# Altium PCB ARDevelopmentPlat.PcbDoc
Units mil, origin at the board's own origin, x right, y up, seen from the top; angles counter-clockwise.
Board outline 1173 x 1385 mil, 2 copper layers (Top Layer, Bottom Layer); 36 components, 58 nets, 168 pads, 68 vias.
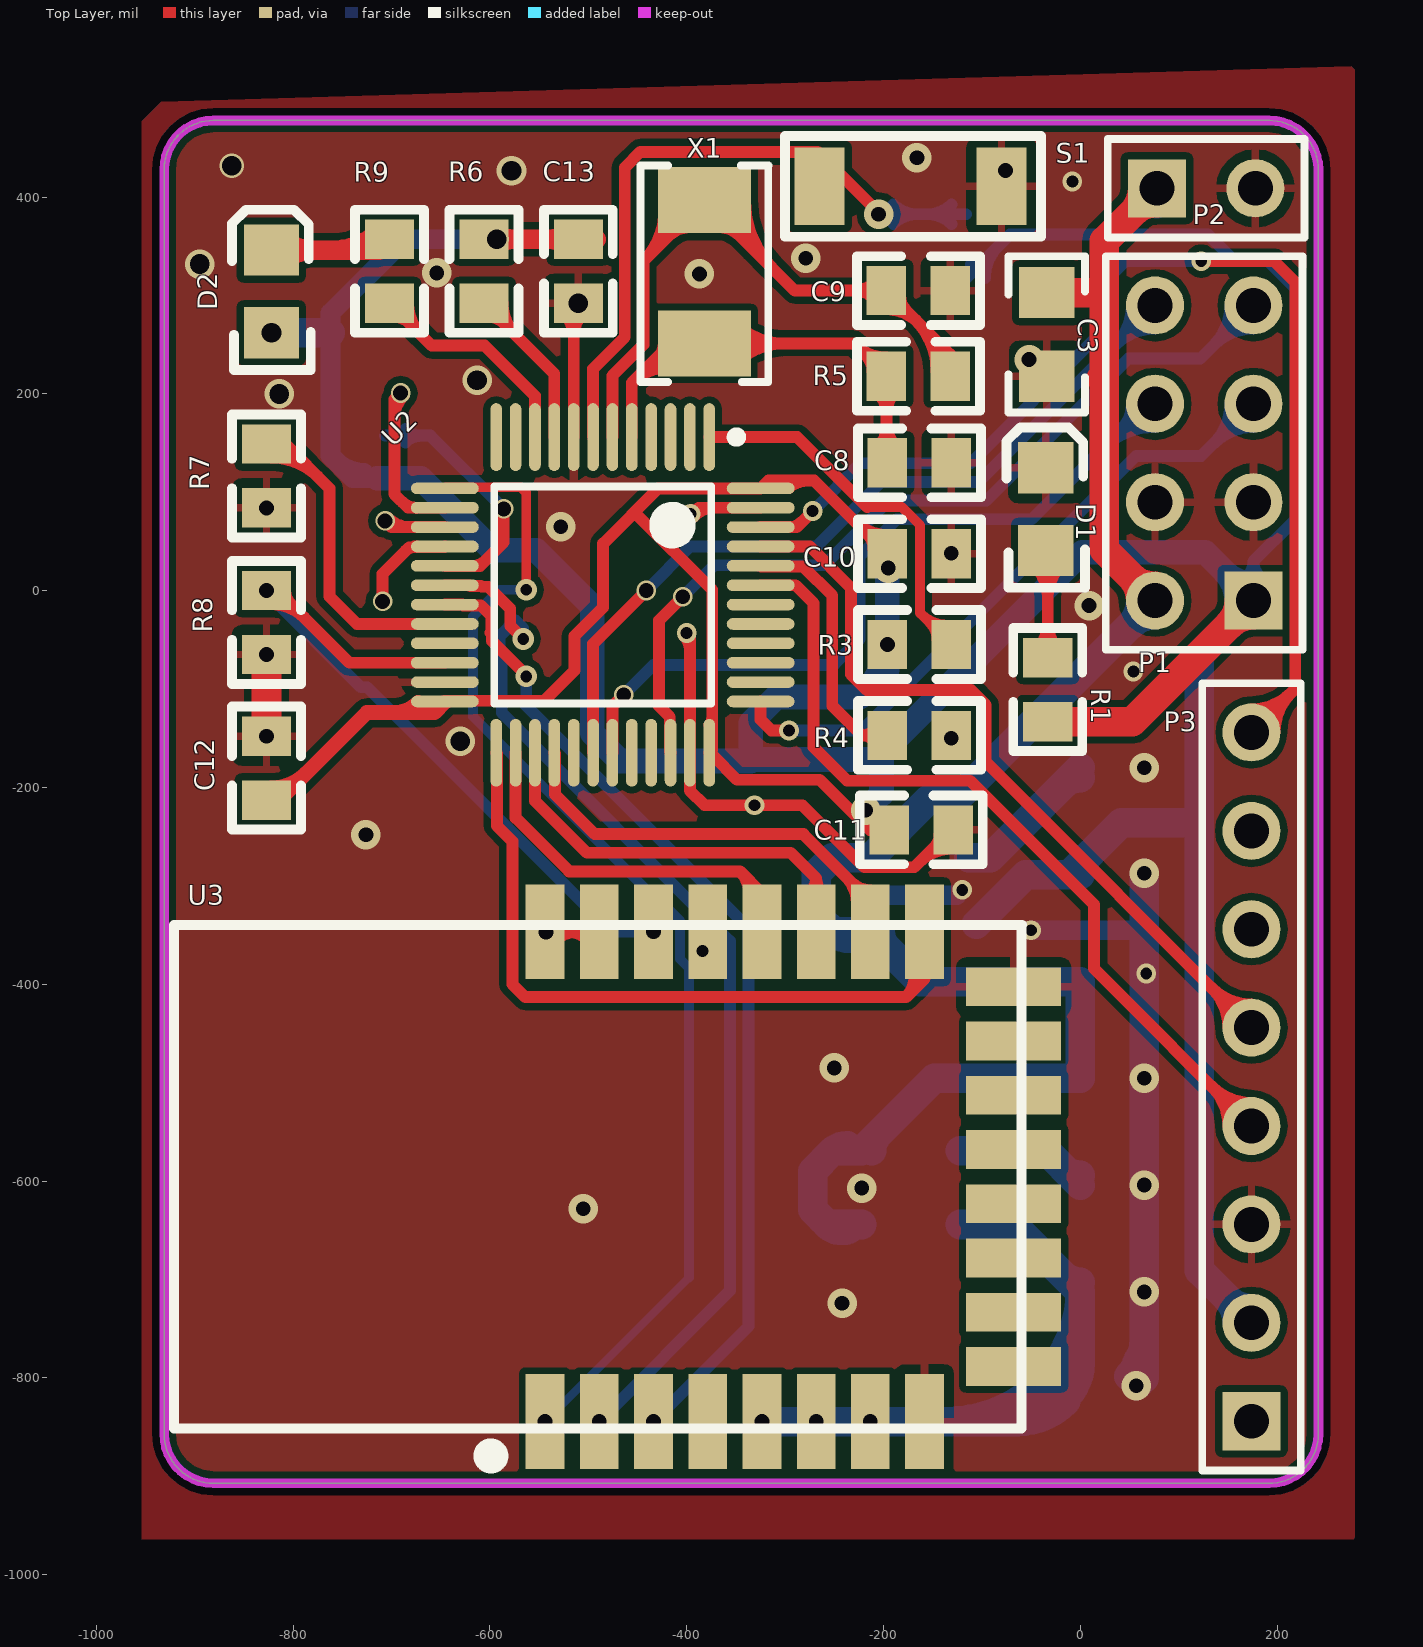
[diagram p0: Top Layer view]
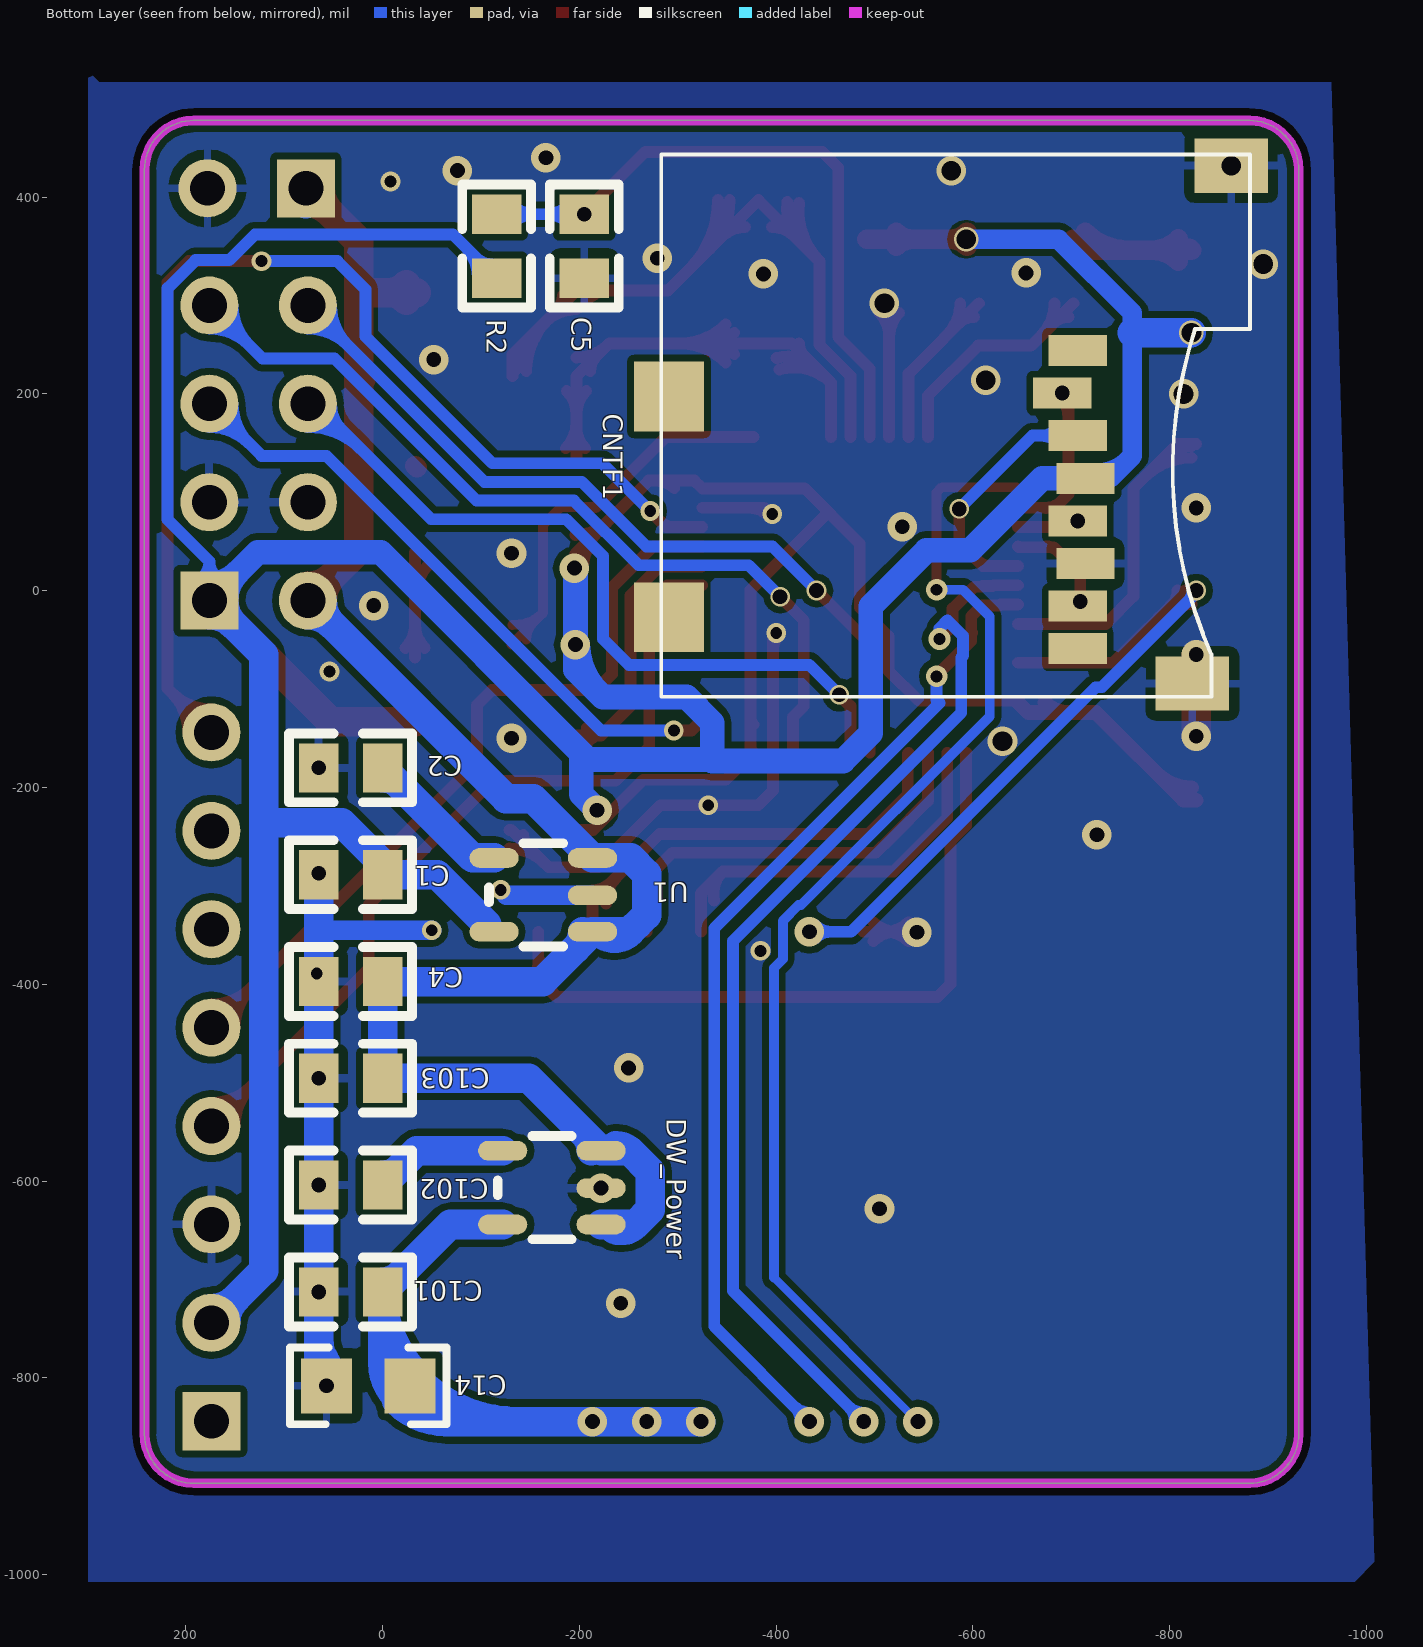
[diagram p1: Bottom Layer view, seen from below]

## Layer stack, top to bottom
Top Solder: solder mask 0.4, Solder Resist, Dk 3.5
Top Layer: signal copper 1.4
Dielectric1: dielectric 12.6, FR-4, Dk 4.8
Bottom Layer: signal copper 1.4
Bottom Solder: solder mask 0.4, Solder Resist, Dk 3.5

## Board outline
-931,-857 ccw(c-881,-857) -881,-907 192,-907 ccw(c192,-857) 242,-857 242,428 ccw(c192,428) 192,478 -881,478 ccw(c-881,428) -931,428

## Design rules (kind name [scope] priority, off if disabled: settings)
AssemblyTestPointUsage AssemblyTestPointUsage_1 [All] p2:
AssemblyTestpoint AssemblyTestpoint_1 [All] p2: testpointundercomponent=TRUE minsize=40 maxsize=100 preferedsize=60 minholesize=0 maxholesize=40 preferedholesize=32 testpointgrid=1 usegrid=TRUE gridtolerance=0.01 allowsidetop=TRUE allowsidebottom=TRUE
Clearance [All] p1: gap=7 ignorepadtopadclearanceinfootprint=FALSE except(0: Arc-Hole Track-Hole SMDPad-Hole THPad-Hole Via-Hole Fill-Hole Poly-Hole Region-Hole Text-Hole)
ComponentClearance [All] p1: gap=1 collisioncheckmode=3 verticalgap=1 showdistances=FALSE
ComponentClearance ComponentClearance_1 [All] p2: gap=1 collisioncheckmode=3 verticalgap=1 showdistances=FALSE
DiffPairsRouting DiffPairsRouting_1 [All] p2: maxlimit=10 minlimit=10 mostfreqgap=10 toplayer_minwidth=15 toplayer_maxwidth=15 toplayer_prefwidth=15 bottomlayer_minwidth=15 bottomlayer_maxwidth=15 bottomlayer_prefwidth=15 maxuncoupledlength=500
FabricationTestPointUsage TestPointUsage [All] p2: valid=0 allowmultiple=FALSE
FabricationTestpoint Testpoint [All] p2: side=3 testpointundercomponent=TRUE minsize=40 maxsize=100 preferedsize=60 minholesize=0 maxholesize=40 preferedholesize=32 testpointgrid=1 allowsidetop=TRUE allowsidebottom=TRUE usegrid=TRUE gridtolerance=0.01
FanoutControl Fanout_LCC [IsLCC] p1: bgadir=Out bgaviamode=Centered fanoutstyle=Auto fanoutdirection=Alternating viagrid=1 // Fanout_LCC (Default Rule)
FanoutControl Fanout_BGA [IsBGA] p2: bgadir=Out bgaviamode=Centered fanoutstyle=Auto fanoutdirection=Alternating viagrid=1 // Fanout_BGA (Default Rule)
FanoutControl Fanout_Small [(CompPinCount < 5)] p3: bgadir=Out bgaviamode=Centered fanoutstyle=Auto fanoutdirection=OutThenIn viagrid=1 // Fanout_Small (Default Rule)
FanoutControl Fanout_SOIC [IsSOIC] p4: bgadir=Out bgaviamode=Centered fanoutstyle=Auto fanoutdirection=Alternating viagrid=1 // Fanout_SOIC (Default Rule)
FanoutControl Fanout_BGA_1 [IsBGA] p6: bgadir=Out bgaviamode=Centered fanoutstyle=Auto fanoutdirection=Alternating viagrid=1 // Fanout_BGA (Default Rule)
FanoutControl Fanout_LCC_1 [IsLCC] p7: bgadir=Out bgaviamode=Centered fanoutstyle=Auto fanoutdirection=Alternating viagrid=1 // Fanout_LCC (Default Rule)
FanoutControl Fanout_SOIC_1 [IsSOIC] p8: bgadir=Out bgaviamode=Centered fanoutstyle=Auto fanoutdirection=Alternating viagrid=1 // Fanout_SOIC (Default Rule)
FanoutControl Fanout_Small_1 [(CompPinCount < 5)] p9: bgadir=Out bgaviamode=Centered fanoutstyle=Auto fanoutdirection=OutThenIn viagrid=1 // Fanout_Small (Default Rule)
FanoutControl Fanout_Default_1 [All] p10: bgadir=Out bgaviamode=Centered fanoutstyle=Auto fanoutdirection=Alternating viagrid=1 // Fanout_Default (Default Rule)
Height Height_1 [All] p2: minheight=0 maxheight=1000 prefheight=500
HoleSize HoleSize_1 [All] p2: absolutevalues=TRUE maxlimit=100 minlimit=1 maxpercent=80.000 minpercent=20.000
HoleToHoleClearance [All] p1: gap=7 allowstackedmicrovias=TRUE
HoleToHoleClearance HoleToHoleClearance_1 [All] p2: gap=7 allowstackedmicrovias=TRUE
LayerPairs LayerPairs_1 [All] p2: enforce=TRUE
MinimumSolderMaskSliver MinimumSolderMaskSliver_1 [All] p2: minsoldermaskwidth=10
NetAntennae NetAntennae_1 [All] p2: netantennaetolerance=0
PasteMaskExpansion PasteMaskExpansion_1 [All] p2: expansion=0
PlaneConnect [All] p1: planeconnectstyle=Relief reliefexpansion=20 reliefentries=4 reliefconductorwidth=15 reliefairgap=10
PolygonConnect PolygonConnect_1 [(InPadClass('All Pads'))] p1: connectstyle=Relief reliefconductorwidth=8 reliefentries=4 polygonreliefangle="90 Angle" airgapwidth=10
PolygonConnect [All] p2: connectstyle=Direct reliefconductorwidth=10 reliefentries=4 polygonreliefangle="90 Angle" airgapwidth=10
RoutingPriority RoutingPriority_1 [All] p2: routingpriority=0
RoutingTopology RoutingTopology_1 [All] p2: topology=Shortest
RoutingVias [All] p1: holewidth=12 width=20 viastyle="Through Hole" minholewidth=12 minwidth=20 maxholewidth=30 maxwidth=50
SilkToSilkClearance SilkToSilkClearance_1 [All] p2: silktosilkclearance=10
SilkToSolderMaskClearance SilkscreenOverComponentPads [IsPad] p1: minsilkscreentomaskgap=10 clearancetoexposedcopper=TRUE
SilkToSolderMaskClearance SilkscreenOverComponentPads_1 [IsPad] p2: minsilkscreentomaskgap=10 clearancetoexposedcopper=TRUE
SolderMaskExpansion [All] p1: expansion=4
SolderMaskExpansion SolderMaskExpansion_1 [All] p2: expansion=4
Width [All] p1: maxlimit=40 minlimit=8 preferedwidth=8
22 further rules are at their usual default settings.

## Classes and differential pairs
component class ARDevelopmentPlat: C5 C8 C9 C10 C11 C12 C13 C15 C101 C102 C103 CNTF1 D1 D2 P2 P3 R1 R2 R3 R4 R5 R6 R7 R8 R9 S1 U2 U3 U4 X1

## Components (designator, comment, footprint, x,y, rotation, side; value= is the part's Value field where it differs from the comment)
C1 "Cap" RC0603 65,-288.58 r180 bottom
C2 "Cap" RC0603 65,-180 r180 bottom
C3 "10uF" RC0805 -34,303 r270 top
C4 "Cap" RC0603 65,-397.17 r180 bottom
C5 "104" RC0603 -204.94,382.73 r270 bottom value=100nF
C8 "22pF" RC0603 -196,130 r0 top value=20pF
C9 "22pF" RC0603 -197,305 r0 top value=20pF
C10 "104" RC0603 -196,37.67 r0 top value=100nF
C11 "104" RC0603 -194,-243 r0 top value=100nF
C12 "104" RC0603 -827,-212.8 r90 top value=100nF
C13 "104" RC0603 -510.03,357.2 r270 top value=100nF
C14 "106" RC0805 -28,-808.08 r0 bottom
C101 "Cap" RC0603 65,-712.58 r180 bottom value=2.2uF
C102 "Cap" RC0603 65,-604 r180 bottom value=0.01uF
C103 "Cap" RC0603 65,-495.42 r180 bottom value=0.1uF
CNTF1 "TFCard" "MICRO SD" -882,266.2 r90 bottom
D1 "LED0" LED0805 -35,41 r270 top
D2 "LED0" LED0805 -822,262.2 r270 top
DW_Power "TPS79333" SOT-23-5 -222,-644.08 r90 bottom (schematic designator U4)
P1 "Header 4X2" HDR2X4 176,-10 r90 top
P2 "Header 2" HDR1X2 78,409 r0 top
P3 "Header 8" HDR1X8 174,-844 r90 top
R1 "510R" RC0603 -33,-68 r270 top
R2 "10K" RC0603 -115.94,382.73 r270 bottom
R3 "0R" RC0603 -131,-54.66 r180 top
R4 "10K" RC0603 -131,-147 r180 top
R5 "1M" RC0603 -132,218 r180 top
R6 "0R" RC0603 -606.02,292.2 r90 top
R7 "10K" RC0603 -827,149.2 r270 top
R8 "Res2" RC0603 -827,-64.8 r90 top value=10K
R9 "510R" RC0603 -702,292.2 r90 top
S1 "SW-SPST" SMT-KEY -265,411 r270 top
U1 "TPS79333" SOT-23-5 -213.29,-346.54 r90 bottom
U2 "STM32F103C8T6" LQFP48 -377,156.2 r180 top
U3 "DW1000" DWM1000 -539,-849.33 r90 top
X1 "8M" SMD5032 -382,397 r270 top value=8MHz

## Footprints (in the part's own frame and the unit in brackets; to place one, negate y for a bottom-side part, rotate by r counter-clockwise, add the part's x,y. Pads: shape width x height; smd on the part's side, far side on the other; paste and mask are expansions set on the pad)
DWM1000 [mm]
  rect 2.45x1 smd: 1(0.127,0.127) 2(0.127,-1.273) 3(0.127,-2.673) 4(0.127,-4.073) 5(0.127,-5.473) 6(0.127,-6.873) 7(0.127,-8.273) 8(0.127,-9.673) 17(12.771,-9.673) 18(12.771,-8.273) 19(12.771,-6.873) 20(12.771,-5.473) 21(12.771,-4.073) 22(12.771,-2.673) 23(12.771,-1.273) 24(12.771,0.127)
  rect 1x2.45 smd: 9(1.549,-11.971) 10(2.949,-11.971) 11(4.349,-11.971) 12(5.749,-11.971) 13(7.149,-11.971) 14(8.549,-11.971) 15(9.949,-11.971) 16(11.349,-11.971)
  silkscreen extent -0.86,-12.19 12.95,9.7
HDR1X2 [mm] "Connector; Header; 2 Position"
  rect 1.5x1.5 hole 0.9: 1(0,0)
  round 1.5 hole 0.9: 2(2.54,0)
  silkscreen extent -1.27,-1.27 3.81,1.27
HDR1X8 [mm] "Connector; Header; 8 Position"
  rect 1.5x1.5 hole 0.9: 1(0,0)
  round 1.5 hole 0.9: 2(2.54,0) 3(5.08,0) 4(7.62,0) 5(10.16,0) 6(12.7,0) 7(15.24,0) 8(17.78,0)
  silkscreen extent -1.27,-1.27 19.05,1.27
HDR2X4 [mm] "Connector; Header; 4x2 Position"
  rect 1.5x1.5 hole 0.9: 1(0,0)
  round 1.5 hole 0.9: 2(0,2.54) 3(2.54,0) 4(2.54,2.54) 5(5.08,0) 6(5.08,2.54) 7(7.62,0) 8(7.62,2.54)
  silkscreen extent -1.27,-1.27 8.89,3.81
LED0805 [mil]
  rect 52x56 smd: 1(0,0) 2(-84,0)
  Top Layer lines w20: -84,0 -86,2
  silkscreen extent -125,-40 38,40
LQFP48 [mm]
  oval 0.3x1.75 smd: 1(0,0) 2(0.5,0) 3(1,0) 4(1.5,0) 5(2,0) 6(2.5,0) 7(3,0) 8(3.5,0) 9(4,0) 10(4.5,0) 11(5,0) 12(5.5,0) 25(5.5,8.15) 26(5,8.15) 27(4.5,8.15) 28(4,8.15) 29(3.5,8.15) 30(3,8.15) 31(2.5,8.15) 32(2,8.15) 33(1.5,8.15) 34(1,8.15) 35(0.5,8.15) 36(0,8.15)
  oval 1.75x0.3 smd: 13(6.825,1.325) 14(6.825,1.825) 15(6.825,2.325) 16(6.825,2.825) 17(6.825,3.325) 18(6.825,3.825) 19(6.825,4.325) 20(6.825,4.825) 21(6.825,5.325) 22(6.825,5.825) 23(6.825,6.325) 24(6.825,6.825) 37(-1.325,6.825) 38(-1.325,6.325) 39(-1.325,5.825) 40(-1.325,5.325) 41(-1.325,4.825) 42(-1.325,4.325) 43(-1.325,3.825) 44(-1.325,3.325) 45(-1.325,2.825) 46(-1.325,2.325) 47(-1.325,1.825) 48(-1.325,1.325)
  silkscreen extent -0.83,-0.12 5.55,6.88
"MICRO SD" [mm]
  rect 0.8x1.5 smd: 1(-0.558,4.459) 2(-1.658,4.859) 3(-2.758,4.459) 4(-3.858,4.259) 5(-4.958,4.459) 6(-6.058,4.259) 7(-7.158,4.459) 8(-8.258,4.459)
  rect 1.4x1.9 smd: 9(-9.158,1.499) 9(4.212,0.499)
  rect 1.8x1.8 smd: ""(-7.448,15.009) ""(-1.748,15.009)
  silkscreen extent -9.5,0.01 4.5,15.21
RC0603 [mil]
  rect 40x50 smd: 1(0,0) 2(65,0)
  silkscreen extent -30,-35 95,35
RC0805 [mil]
  rect 52x56 smd: 1(0,0) 2(85,0)
  silkscreen extent -37,-39 122,39
SMD5032 [mm]
  rect 1.7x2.4 smd: 1(0,0) 2(3.7,0)
  silkscreen extent -0.89,-1.65 4.7,1.65
SMT-KEY [mm]
  rect 2x1.3 smd paste+0 mask+0.2: 1(0,0) 2(0,4.7)
  silkscreen extent -1.3,-0.89 1.3,5.72
SOT-23-5 [mil]
  oval 20x50 smd: 1(0,0) 2(37,0) 3(75,0) 4(75,100) 5(0,100)
  silkscreen extent -15,30 90,105

## Part data
C1 C2 C101 C102 C103: "Capacitor"
  C101 C102 C103: LatestRevisionDate=17-Jul-2002, LatestRevisionNote="Re-released for DXP Platform.", PackageDescription="Radial Cap, Thru-Hole; 2 Leads; 0.3 in Pin Spacing", PackageReference=RAD-0.3, Published=8-Jun-2000, Publisher="Altium Limited"
C3: library part cap_polarity2, "Electrolytic Capacitor"
C4: library part CAP, "Capacitor"
C5 C8 C9 C10 C11 C12 C13: library part CAP1, "Capacitor", Tolerate=50V, PCB_Layout="Top Layer SMC", Publisher=ZL_A0OFFICE, Revision=2012-3-28
  C5 C10 C11 C12 C13: ERP=0103020075, TOL=10%
  C8 C9: ERP=0103020090, TOL=2%
C14: library part CAP1, "Capacitor"
D1 D2: "Typical INFRARED GaAs LED"
P1: "Header, 4-Pin, Dual row"
P2: "Header, 2-Pin", LatestRevisionDate=17-Jul-2002, LatestRevisionNote="Re-released for DXP Platform.", Publisher="Altium Limited"
P3: "Header, 8-Pin", LatestRevisionDate=17-Jul-2002, LatestRevisionNote="Re-released for DXP Platform.", Publisher="Altium Limited"
R1 R2 R3 R4 R5 R6 R7 R9: library part R
R8: "Resistor", LatestRevisionDate=17-Jul-2002, LatestRevisionNote="Re-released for DXP Platform.", PackageDescription="Axial Device, Thru-Hole; 2 Leads; 0.4 in Pin Spacing", PackageReference=AXIAL-0.4, Published=8-Jun-2000, Publisher="Altium Limited"
S1: "Single-Pole, Single-Throw Switch"
X1: library part XTAL_SMD, "Crystal Oscillator", Tolerate="ROSON -20_+70 20pf", ERP=0103040021, PCB_Layout="Top Layer SMC", Publisher=ZL_A0OFFICE, Revision=2012-3-28, TOL=±20ppm

## Via types
v1: diameter 30, hole 15, Top Layer to Bottom Layer, 36 vias
v2: diameter 20, hole 12, Top Layer to Bottom Layer, 12 vias
v3: diameter 20, hole 15, Top Layer to Bottom Layer, 8 vias
v4: diameter 30, hole 20, Top Layer to Bottom Layer, 6 vias
v5: diameter 22, hole 12, Top Layer to Bottom Layer, 3 vias
v6: diameter 25, hole 20, Top Layer to Bottom Layer, 3 vias

## Nets (pads, with @x,y where several pads share a name; then routed paths per layer and width w, separated by ;. In a path a pad name is that pad's centre, name@x,y a point inside that pad or via, vN(x,y) a via of type N, cw(c..) or ccw(c..) an arc to the next point about the centre after c; other vN are vias at no path point)
3V3: C1.2 C10.1 C11.1 C12.1 C13.1 CNTF1.4 D2.1 P1.1 P3.2 R1.2 R2.2 R3.2 R6.2 U1.5 U2.24 U2.36 U2.48 | length 6205.8
  Top Layer w12: U2.24@-645.7,-113.32 -644.2,-111.82 -544.82,-111.82 -514.11,-81.11 -514.11,-46.04 -485,-16.93 -485,48 -428.97,104.03 U2.48 -316.87,112 -270.33,112 C10.1 ; -452,79 -374,1 -374,-161.67 U2.36 ; U2.36@-376.93,-136.19 ccw(c-384.02,-129.11) -374,-129.11 ; U2.36@-373.07,-167.87 -348.95,-192 -264.87,-192 -213.87,-243 C11.1 ; -228.44,70.1 ccw(c-196,102.54) C10.1@-196,56.67 ; -220.03,61.69 cw(c-258.72,23) C10.1@-204,23 ; -216.37,58.03 cw(c-231.73,42.67) C10.1@-210,42.67 ; C10.1@-199.54,41.21 cw(c-217.75,23) C10.1@-192,23 ; U2.48@-296.36,104.1 cw(c-277.28,85.02) -277.28,112 ccw(c-277.28,85.02) U2.48@-296.36,104.1
  Top Layer w15: C12.1 -814,-212.8 -725,-123.8 -656.18,-123.8 U2.24@-645.7,-113.32 ; C12.1@-822,-200.3 ccw(c-822,-150.81) -787,-185.81 ; -697.67,-123.8 ccw(c-697.67,-89.08) U2.24@-673.12,-113.63
  Top Layer w20: R6.2@-593.95,350.13 cw(c-576.87,333.06) -576.87,357.2 cw(c-576.87,381.34) R6.2@-593.95,364.27 ; v6(-593,357.2) C13.1 C13.1@-492,357.2 ; C13.1@-522.1,350.13 ccw(c-539.17,333.06) -539.17,357.2 ccw(c-539.17,381.34) C13.1@-522.1,364.27
  Top Layer w30: R1.2 53,-133 P1.1 ; P1.1@161.47,-10 cw(c126.4,-10) 151.2,-34.8 cw(c176,-59.6) P1.1@176,-24.53
  Bottom Layer w12: R2.2 -71.67,362 130,362 156,336 190.14,336 218.53,307.62 218.53,72.39 176,29.86 ; R2.2@-110.94,331.73 ccw(c-110.94,353.46) -95.57,338.1 ; R2.2@-96.94,317.73 cw(c-51.07,317.73) -83.5,350.17 ; P1.1@164.63,10.6 ccw(c154.01,29.86) 176,29.86 ; P1.1 176,29.86 ; P1.1@187.37,10.6 cw(c197.99,29.86) 176,29.86
  Bottom Layer w20: -762,262.2 -762,137.2 -739.12,114.32 CNTF1.4 ; -762,266.2 -762,282.2 -687,357.2 v6(-593,357.2) ; -756.74,131.93 ccw(c-728.09,160.58) CNTF1.4@-728.09,120.07
  Bottom Layer w25: CNTF1.4 -670.32,114.32 -597,41 -552.79,41 -496,-15.79 -496,-145 -468,-173 -335,-173 -335,-134 -309,-108 -223.88,-108 -196,-80.12 v1(-196,-54.67) v1@-196,23 ; -333.5,-171.5 -208.5,-171.5 2.03,39.03 126.97,39.03 P1.1 ; -218.27,-102.38 ccw(c-265.98,-54.67) v1@-198.5,-54.67 ; v1(-218,-223) -202,-207 -202,-173 ; P1.1@158.97,-10 ccw(c117.87,-10) 146.93,19.07 ccw(c176,48.14) P1.1@176,7.03
  Bottom Layer w30: v6(-822,262.2) -762,262.2 ; U1.5@-105.88,-339.12 -55.34,-288.58 C1.2@-11.11,-288.58 ; C1.2 C1.2@-11.11,-288.58 ; P3.2@159.47,-744 ccw(c124.4,-744) 149.2,-719.2 ccw(c174,-694.4) P3.2@174,-729.47 ; P1.1@161.47,-10 cw(c126.4,-10) 151.2,-34.8 cw(c176,-59.6) P1.1@176,-24.53 ; P3.2 121,-691 121,-236 ; P1.1 121,-65 121,-236 ; C1.2@-11.11,-288.58 41.47,-236 121,-236
  other v1: -195,23
3V3_DW: C14.1 C101.2 DW_Power.5 U3.5 U3.6 U3.7 | length 939.1
  Bottom Layer w30: v1(-323.53,-844.33) -64.25,-844.33 C14.1 0,-780.08 C101.2 ; -137.24,-844.33 ccw(c-137.24,-700.84) C14.1@-35.78,-802.31 ; DW_Power.5 -68.5,-644.08 C101.2 ; -64.82,-844.33 ccw(c-64.82,-773.27) C14.1@-14.56,-823.52 ; C14.1@-50.19,-830.28 cw(c-28,-852.47) C14.1@-28,-821.08 ; C14.1@-35.74,-798.27 ccw(c-120.57,-712.59) C101.2 ; C14.1@-28,-795.08 ccw(c-28,-763.7) C14.1@-5.81,-785.89 ; C101.2@-17.07,-695.51 ccw(c0,-678.44) C101.2@0,-702.58 ; C14.1@-14.63,-819.59 ccw(c-49.36,-784.51) 0,-784.51
  other v1: -268.41,-844.33 -213.29,-844.33
5V: C3.1 C4.2 C103.2 DW_Power.1 DW_Power.3 P1.2 P2.1 U1.1 U1.3 | length 2218.7
  Top Layer w30: C3.1 24.47,303 ; C3.1@-24.22,295.22 cw(c-5.44,276.44) -5.44,303 cw(c-5.44,329.56) C3.1@-24.22,310.78 ; 21.47,216 24.47,219 ; P1.2@61.47,-10 ccw(c26.4,-10) 51.2,14.8 ccw(c76,39.6) P1.2@76,4.53 ; P2.1@63.47,409 cw(c28.4,409) 53.2,384.2 cw(c78,359.4) P2.1@78,394.47 ; P1.2 24.47,41.53 24.47,219 ; P2.1 24.47,355.47 24.47,219
  Bottom Layer w30: -262.46,-638.54 ccw(c-237,-613.07) DW_Power.1@-237,-649.08 ; -259.31,-338.69 ccw(c-228.29,-307.67) U1.1@-228.29,-351.54 ; -256.92,-644.08 ccw(c-242.45,-629.62) DW_Power.1@-235.24,-648.76 ; -252.51,-570.51 cw(c-237,-586.01) DW_Power.3@-237,-564.08 ; U1.1@-226.21,-351.08 cw(c-235.56,-330.64) -251.46,-346.54 ; DW_Power.1 -256.92,-644.08 -272,-629 -272,-590 -251.08,-569.08 DW_Power.3 -148.33,-495.42 C103.2 C4.2 -162.66,-397.17 U1.1 -251.46,-346.54 ; DW_Power.3@-212,-569.08 cw(c-187.86,-569.08) -204.93,-552.01 ; U1.1@-203.29,-346.54 ccw(c-179.15,-346.54) -196.22,-363.61 ; P1.2@61.47,-10 cw(c26.4,-10) 51.2,-34.8 cw(c76,-59.6) P1.2@76,-24.53 ; P1.2 -125.25,-211.25 -153,-211.25 U1.3 -252.19,-271.54 -268.41,-287.76 -268.41,-329.59 -251.46,-346.54 ; P2.1@78,393.56 P2.1
BOOT0: R4.2 U2.44 | length 299.8
  Top Layer w12: U2.44 -324.15,24.61 -281.37,24.61 -252,-4.76 -252,-117 -222,-147 ; R4.2@-207.69,-154.7 ccw(c-222,-164.14) -222,-147 ; R4.2@-207.69,-139.29 cw(c-222,-129.86) -222,-147 ; R4.2 -222,-147
DRDY: P3.8 U2.46 | length 1272.4
  Top Layer w12: U2.46 -288.34,64.66 v2(-272,81) ; U2.46@-296.29,64.57 ccw(c-296.29,83.53) -282.88,70.12 ; v2(123,335) 197,335 218.53,313.47 218.53,-99.47 P3.8 ; P3.8@174,-120.47 ccw(c174,-63.67) 214.16,-103.84 ccw(c254.33,-144) P3.8@197.53,-144
  Bottom Layer w12: v2(-272,81) -223.33,129.67 -111.33,129.67 17.5,258.5 17.5,306.5 46,335 v2(123,335)
DW_LED_RX: U3.13
DW_LED_TX: U3.12
DWM_RSTN: U2.19 U3.3 | length 1056.5
  Top Layer w12: U2.19 -627.79,-14.08 -627.01,-14.86 -609.33,-14.86 -598.25,-25.93 -598.25,-41.59 -599.26,-42.61 -598,-43.87 -598,-50.94 -563,-85.94 v5(-563,-87)
  Bottom Layer w12: v5(-563,-87) -563,-111 -566,-114 -337,-343 -337,-747.57 v1(-433.76,-844.33) ; v1@-433.76,-835.33 ccw(c-433.76,-813.61) -418.4,-828.97 ccw(c-403.04,-844.33) v1@-424.76,-844.33
DWM_WAKEUP: U2.18 U3.2 | length 1141.9
  Top Layer w12: U2.18 -620.61,5.61 -619.83,4.83 -609.33,4.83 -608.64,4.14 -601.46,4.14 -579.25,-18.06 -579.25,-35.75 v5(-566,-49)
  Bottom Layer w12: v5(-566,-49) -566,-38.06 -574,-30.06 -590,-46.06 -590,-65.94 -588,-67.94 -588,-124 -356,-356 -356,-711.45 v1(-488.88,-844.33) ; v1@-488.88,-835.33 ccw(c-488.88,-813.61) -473.52,-828.97 ccw(c-458.15,-844.33) v1@-479.88,-844.33
EXTON: 
G0: U3.15
G1: U3.14
G4: U3.11
G5: U3.10
G6: U3.9
GND: C1.1 C2.1 C3.2 C4.1 C5.2 C8.2 C9.2 C10.2 C11.2 C12.2 C13.2 C14.2 C101.1 C102.1 C103.1 CNTF1.6 CNTF1.9 D1.2 DW_Power.2 P1.3 P1.4 P2.2 P3.3 R4.1 R7.2 R8.1 S1.2 U1.2 U2.8 U2.23 U2.35 U2.47 U3.8 U3.16 U3.21 U3.23 U3.24 | length 2037.9
  Top Layer w12: C12.2@-835.05,-136.35 ccw(c-845.97,-120.84) -827,-120.84 ccw(c-808.03,-120.84) C12.2@-818.94,-136.35 ; C12.2@-833.36,-141.44 ccw(c-848.73,-126.07) -827,-126.07 ccw(c-805.27,-126.07) C12.2@-820.64,-141.44 ; U3.24 U3.23 ; U3.24@-536.64,-353.36 cw(c-520.16,-369.84) -520.16,-346.54 ; U3.24@-536.64,-340.64 ccw(c-522.39,-326.39) -522.39,-346.54 ; U3.24@-534.32,-356.21 cw(c-510.96,-379.58) -510.96,-346.54 cw(c-510.96,-313.5) U3.24@-534.32,-336.86 ; C13.2@-524.93,282.3 cw(c-549.41,257.82) -514.79,257.82 ; U2.8 -514.79,287.44 v4(-510.03,292.2) ; C13.2@-505.13,282.3 ccw(c-481.81,258.98) -514.79,258.98 cw(c-476.81,258.98) C13.2@-503.67,285.83 ; U3.23@-498.56,-356.21 ccw(c-521.92,-379.58) -521.92,-346.54 ccw(c-521.92,-313.5) U3.23@-498.56,-336.86 ; v2@-402.83,-45.83 cw(c-417.66,-60.66) -396.68,-60.66 ; v2(-400,-43) -396.68,-46.32 U2.35 -396.68,-203.12 -381.8,-218 v2(-331,-218) -282.38,-218 -219.38,-281 -168.61,-281 -130.61,-243 C11.2 ; v2@-395.3,81.94 ccw(c-393.79,90.48) -387.65,84.35 ; v2@-394,78 -387.65,84.35 ; v2@-393.17,75.17 cw(c-371.02,53.02) -371.02,84.35 ; U2.47 -387.65,84.35 ; -164.19,-276.58 cw(c-129,-311.77) C11.2@-129,-262 ; C11.2@-148.22,-260.61 ccw(c-160.83,-248) C11.2@-143,-248
  Top Layer w30: v1(-827,-147.8) v1(-827,-64.8)
  Bottom Layer w20: U1.2 v2@-125.54,-309.54 ; v2(-50,-345) 64,-345
  Bottom Layer w30: C14.2@49.22,-798.31 ccw(c11.13,-760.21) 65,-760.21 ; 59.81,-779.97 ccw(c89.54,-797.14) v1(57,-808.08) ; C14.2@65,-788.77 cw(c37.68,-788.77) v1(57,-808.08) ; v1(65,-287) C4.1 v1(65,-604) 65,-800.08 v1(57,-808.08)
  other v1: -242,-724 65,-712.58 -505,-628 -222,-607.08 65,-495.42 -250,-485 -543,-347 -726,-248 65,-180 -131,-150 9,-15 -131,38 -528,65 -827,84.2 -52,235 -387,322 -654,323 -279,338 -76,427 -166,440
  other v2: 67,-389 -384,-366 -120,-304 54,-82 -396,78 -8,416
  other v4: -630,-153 -814,200 -613,214 -895,332 -578,427
  other v6: -862.34,432.04
NetC2_2: C2.2 U1.4 | length 170.2
  Bottom Layer w30: U1.4 -91.54,-271.54 C2.2 ; C2.2@-17.07,-197.07 cw(c0,-214.14) C2.2@0,-190
NetC8_1: C8.1 R5.2 U2.5 X1.2 | length 869.1
  Top Layer w12: U2.5 -455.74,211.33 ; -441.31,225.75 cw(c-411.57,196.01) X1.2@-400.02,236.46 ; X1.2@-428.55,238.52 ccw(c-441.37,251.33) X1.2@-423.24,251.33 ; X1.2@-403.32,224.92 ccw(c-417.97,173.56) -455.74,211.33 ; X1.2@-357.29,240.4 cw(c-330.89,214) -330.89,251.33 cw(c-330.89,288.67) X1.2@-357.29,262.27 ; X1.2@-348.8,231.91 cw(c-301.92,185.03) -301.92,251.33 cw(c-301.92,317.64) X1.2@-348.8,270.75 ; -229.44,250.44 ccw(c-197,282.87) R5.2@-197,237 ; -217.37,238.37 cw(c-232.73,223) R5.2@-211,223 ; R5.2@-206.9,203.1 cw(c-230.8,179.2) -197,179.2 cw(c-163.2,179.2) R5.2@-187.1,203.1 ; C8.1@-205.9,144.9 ccw(c-227.38,166.38) -197,166.38 ; C8.1@-197,131 R5.2 -230.33,251.33 X1.2 -415.74,251.33 -455.74,211.33 ; -197,171.21 ccw(c-159.79,171.21) C8.1@-186.1,144.9
NetC9_1: C9.1 R5.1 U2.6 X1.1 | length 1114.6
  Top Layer w12: U2.6 -475.42,218.51 -444,249.94 -444,335 ; -426.22,352.78 ccw(c-463.3,389.85) X1.1@-411.16,395.37 ; X1.1@-423.09,394.11 cw(c-495.44,386.45) -444,335 ; -419.14,359.86 cw(c-395.78,336.5) X1.1@-395.78,369.54 ; X1.1@-368.22,369.54 cw(c-368.22,336.5) -344.86,359.86 ; X1.1@-352.76,397 ccw(c-282.15,397) -332.08,347.08 ; X1.1@-340.76,397 ccw(c-241.18,397) -311.59,326.59 ; C9.1@-206.9,295.1 ccw(c-230.8,271.2) -230.8,305 ccw(c-230.8,338.8) C9.1@-206.9,314.9 ; C9.1@-197,286 cw(c-197,240.13) -164.56,272.56 ; C9.1@-183,300 ccw(c-161.27,300) -176.63,284.64 ; -167.92,275.92 cw(c-220.85,223) R5.1@-146,223 ; -147.44,255.44 cw(c-179.87,223) R5.1@-134,223 ; R5.1 -132,240 C9.1 -290,305 X1.1 -444,335
NetC102_2: C102.2 DW_Power.4 | length 155.4
  Bottom Layer w30: DW_Power.4 -34.92,-569.08 C102.2 ; C102.2@-17.07,-586.93 ccw(c0,-569.86) C102.2@0,-594
NetD1_1: D1.1 R1.1 | length 235.9
  Top Layer w12: D1.1@-47.14,26.86 cw(c-81.29,-7.29) -33,-7.29 cw(c15.28,-7.28) D1.1@-18.86,26.86 ; R1.1@-42.9,-58.1 ccw(c-66.8,-34.2) -33,-34.2 ccw(c0.8,-34.2) R1.1@-23.1,-58.1 ; R1.1 D1.1@-33,39
NetD2_2: D2.2 R9.2 | length 233.7
  Top Layer w20: D2.2 -713,346.2 R9.2 ; D2.2@-808.69,334.88 cw(c-781.37,307.57) -781.37,346.2 cw(c-781.37,384.83) D2.2@-808.69,357.51 ; -757.7,346.2 ccw(c-757.7,407.9) R9.2@-714.07,364.27
NRST: C5.1 R2.1 S1.1 U2.7 | length 808
  Top Layer w12: U2.7 -495.11,225.7 -463,257.81 -463,430 -447,446 -267,446 -204.93,383.93 v1(-204.93,382.73)
  Bottom Layer w12: v1(-204.93,382.73) R2.1 ; C5.1@-198.57,376.37 cw(c-183.21,361.01) -183.21,382.73 cw(c-183.21,404.46) C5.1@-198.57,389.1 ; C5.1@-190.04,372.83 cw(c-166.13,348.93) -166.13,382.73 cw(c-166.14,416.53) C5.1@-190.04,392.63 ; R2.1@-130.84,372.83 ccw(c-154.73,348.93) -154.73,382.73 ccw(c-154.73,416.53) R2.1@-130.84,392.63
PA0: R9.1 U2.10 | length 281.8
  Top Layer w12: R9.1 -659,249.2 -605.2,249.2 -554.17,198.17 U2.10 ; R9.1@-697,278.2 cw(c-697,256.47) -681.64,271.83 ; R9.1@-683,292.2 ccw(c-637.13,292.2) -669.57,259.76
PA1: U2.11
PA2: U2.12
PA3: U2.13 U3.1 | length 1220.9
  Top Layer w10: U2.13 -644.53,105.2 -568.2,105.2 -563,100 v5(-563,1)
  Bottom Layer w8: v1(-544,-844.33) -397.67,-698
  Bottom Layer w10: v5(-563,1) -590,1 -617,-26 -617,-127.82 -425.28,-319.54 -422.58,-319.54 -406.76,-335.35 -406.76,-374.35 -397.67,-383.45 -397.67,-698
PA8: U2.29
PA11: U2.32
PA12: U2.33
PB2: R7.1 U2.20 | length 405
  Top Layer w12: R7.1 -808,149.2 -763,104.2 -763,-5.8 -735,-33.8 -645.74,-33.8 U2.20 ; R7.1@-822,135.2 cw(c-822,67.6) -774.2,115.4 ; R7.1@-822,147.2 cw(c-822,108.57) -794.69,135.89
PB5: U2.41
PB6: U2.42
PB10: U2.21
PB11: R8.2 U2.22 U3.22 | length 877.2
  Top Layer w12: R8.2@-827,-3.8 cw(c-827,-40.02) -801.39,-14.41 ; v3(-827,0.2) -816,0.2 -742.67,-73.13 U2.22 ; R8.2@-822,-13.8 cw(c-822,-62.09) -787.86,-27.95 ; R8.2@-808,0.2 ccw(c-788.69,0.2) R8.2@-802.34,-13.46
  Bottom Layer w12: v3(-827,0.2) -827,-2.01 -731.01,-98 -724.6,-98 -476.06,-346.54 v1(-433.76,-346.54) ; v3@-823,0.2 ccw(c-808.02,0.2) -818.61,-10.39 ; v1@-440.13,-352.9 ccw(c-455.49,-368.27) -455.49,-346.54 ccw(c-455.49,-324.81) v1@-440.13,-340.17
PB12: U2.25 U3.17 | length 783.6
  Top Layer w12: U2.25 -592.85,-165.35 -592.85,-238.82 -577,-254.67 -577,-399.84 -563.84,-413 -177,-413 ; U3.17@-170.75,-380.48 cw(c-197.87,-392.13) -177,-413 ; -164.48,-400.48 ccw(c-180.35,-384.6) U3.17@-159.72,-375.75 ; U3.17 -158.17,-394.17 -177,-413
PB13: U2.26 U3.20 | length 419.8
  Top Layer w12: U2.26 -573.85,-230.95 -519.49,-285.31 -345.69,-285.31 ; U3.20@-336.91,-315.11 ccw(c-368.65,-308.27) -345.69,-285.31 ; U3.20 -323.53,-307.47 -345.69,-285.31
PB14: U2.27 U3.19 | length 455.5
  Top Layer w12: U2.27 -554.17,-213.64 -517,-250.8 -516.87,-250.8 -501.36,-266.31 -294.37,-266.31 -268.41,-292.27 ; U3.19@-276.06,-306.65 ccw(c-285.74,-292.27) -268.41,-292.27 ; U3.19 -268.41,-292.27 ; U3.19@-260.76,-306.65 cw(c-251.07,-292.27) -268.41,-292.27
PB15: U2.28 U3.18 | length 491.1
  Top Layer w12: U2.28 -533.7,-165.45 -533.7,-207.1 -493.49,-247.31 -281.34,-247.31 -213.29,-315.36 U3.18 ; -238.52,-290.13 cw(c-266.38,-317.99) U3.18@-226.98,-317.99 ; -232.15,-296.5 ccw(c-213.29,-277.64) U3.18@-213.29,-304.31
PC13: U2.2
PC14: U2.3
PC15: U2.4
SCL: P3.4 U2.43 | length 939.5
  Top Layer w12: U2.43 -289.24,5.61 -271,-12.63 -271,-159 -236.88,-193.12 -111.88,-193.12 14,-319 14,-384 P3.4 ; P3.4@150.47,-544 ccw(c93.67,-544) 133.84,-503.84 ccw(c174,-463.67) P3.4@174,-520.47
SDA: P3.5 U2.45 | length 876.1
  Top Layer w12: U2.45 -274.87,44.98 -233,3.11 -233,-84.88 -216.88,-101 -111,-101 -96,-116 -96,-174 P3.5 ; P3.5@150.47,-444 ccw(c93.67,-444) 133.84,-403.84 ccw(c174,-363.67) P3.5@174,-420.47
SPI1_MISO: CNTF1.7 U2.16 | length 116
  Top Layer w12: v3(-709,-10.8) -709,17.27 -681.98,44.29 -646.39,44.29 U2.16 ; -686.12,40.15 cw(c-674.24,28.28) U2.16@-674.24,45.07
SPI1_MOSI: CNTF1.3 U2.17 | length 305.4
  Top Layer w12: U2.17 -609.91,25.29 -586,49.2 v3(-586,83.2) ; U2.17@-617.16,25.2 ccw(c-617.16,42.47) -604.94,30.26
  Bottom Layer w12: CNTF1.3 -660.43,157.63 v3(-586,83.2) ; CNTF1.3@-685.77,150.74 cw(c-669.13,134.1) -669.13,157.63 cw(c-669.13,181.16) CNTF1.3@-685.77,164.52
SPI1_NSS: CNTF1.2 U2.14 | length 203.6
  Top Layer w12: -697,176.05 cw(c-665.81,176.05) v3@-687.86,198.11 ; v3(-690.69,200.94) -697,194.63 -697,98.2 -683.15,84.35 U2.14 ; -689.29,90.48 ccw(c-674.24,105.53) U2.14@-674.24,84.25
SPI1_SCK: CNTF1.5 U2.15 | length 88
  Top Layer w12: v3(-706.44,71.02) -700.09,64.66 U2.15 ; v3@-703.61,73.84 ccw(c-681.44,96.01) -681.44,64.66
SWCLK: P1.5 U2.37 | length 750.7
  Top Layer w12: U2.37 -324.83,-131.17 -314,-142 v2(-296,-142)
  Bottom Layer w12: v2(-296,-142) -221.82,-142 57.18,137 123,137 P1.5 ; P1.5@152.47,190 cw(c95.67,190) 135.84,149.84 cw(c176,109.67) P1.5@176,166.47
SWDIO: P1.7 U2.34 | length 965.3
  Top Layer w12: U2.34 -417.15,-163.89 -417.15,-128.29 -428,-117.44 -428,-30 v3(-404,-6)
  Bottom Layer w12: v3(-404,-6) -372.02,25.98 -260.15,25.98 -194.46,91.67 -95.46,91.67 48.87,236 122,236 P1.7 ; P1.7@152.47,290 cw(c95.67,290) 135.84,249.84 cw(c176,209.67) P1.7@176,266.47
SYNC: U3.4
TDI/PA15: U2.38
TDO/PB3: U2.39
TRST/PB4: U2.40
USART1_RX: P1.6 U2.31 | length 901.6
  Top Layer w12: U2.31 -475.43,-117.23 v3(-464,-105.8)
  Bottom Layer w12: v3(-464,-105.8) -433.65,-75.45 -250.27,-75.45 -224,-49.18 -224,35.26 -186.59,72.67 -49.2,72.67 68.13,190 P1.6 ; 22.4,144.27 cw(c76,90.67) P1.6@76,166.47 ; 41.4,163.27 ccw(c14.67,190) P1.6@52.47,190 ; 42.89,164.76 cw(c76,131.64) P1.6@76,178.47
USART1_TX: P1.8 U2.30 | length 913.5
  Top Layer w12: U2.30 -495.11,-53.91 v3(-441,0.2)
  Bottom Layer w12: v3(-441,0.2) -396.22,44.98 -268.02,44.98 -202.33,110.67 -103.33,110.67 P1.8 ; P1.8@52.47,290 cw(c-4.33,290) 35.84,249.84 cw(c76,209.67) P1.8@76,266.47
VBAT: R3.1 U2.1 | length 439.1
  Top Layer w10: -216.46,85 -181.36,85 -163,66.64 -163,7.7 -163,-22.67 ; -153.07,-32.59 cw(c-170.14,-49.67) R3.1@-146,-49.67 ; R3.1@-131.76,-34.68 cw(c-133.86,6.47) -163,-22.67 ; R3.1 -163,-22.67
  Top Layer w12: U2.1 -287.66,156.2 -216.46,85
VDDA: R6.1 U2.9 | length 218.7
  Top Layer w12: R6.1 -534.48,220.66 U2.9 ; R6.1@-601.02,278.2 cw(c-601.02,256.47) -585.65,271.83 ; R6.1@-587.02,292.2 ccw(c-541.15,292.2) -573.58,259.76
pads on no net: CNTF1. CNTF1.1 CNTF1.8 P3.1 P3.6 P3.7

## Polygon pours and split planes (outlines as drawn)
GND on Top Layer "Top Layer-No Net" (solid, pour order 8): -934,497 -954,477 -954,-964 281,-964 279,-962 279,533
GND on Bottom Layer "Top Layer-No Net" (solid, pour order 10): -964,517 288,517 299,528 299,-1007 -988,-1007 -1008,-987

## Keep-outs
Keep-Out Layer:
  lines w10: -931,-857 ccw(c-881,-857) -881,-907 192,-907 ccw(c192,-857) 242,-857 242,428 ccw(c192,428) 192,478 145,478 -881,478 ccw(c-881,428) -931,428 -931,-803 -931,-857